# Altium PCB final.PcbDoc
Units mm, origin at the board's own origin, x right, y up, seen from the top; angles counter-clockwise.
Board outline 152.4 x 101.6 mm, 2 copper layers (Top Layer, Bottom Layer); 5 components, 12 nets, 30 pads, 2 vias.
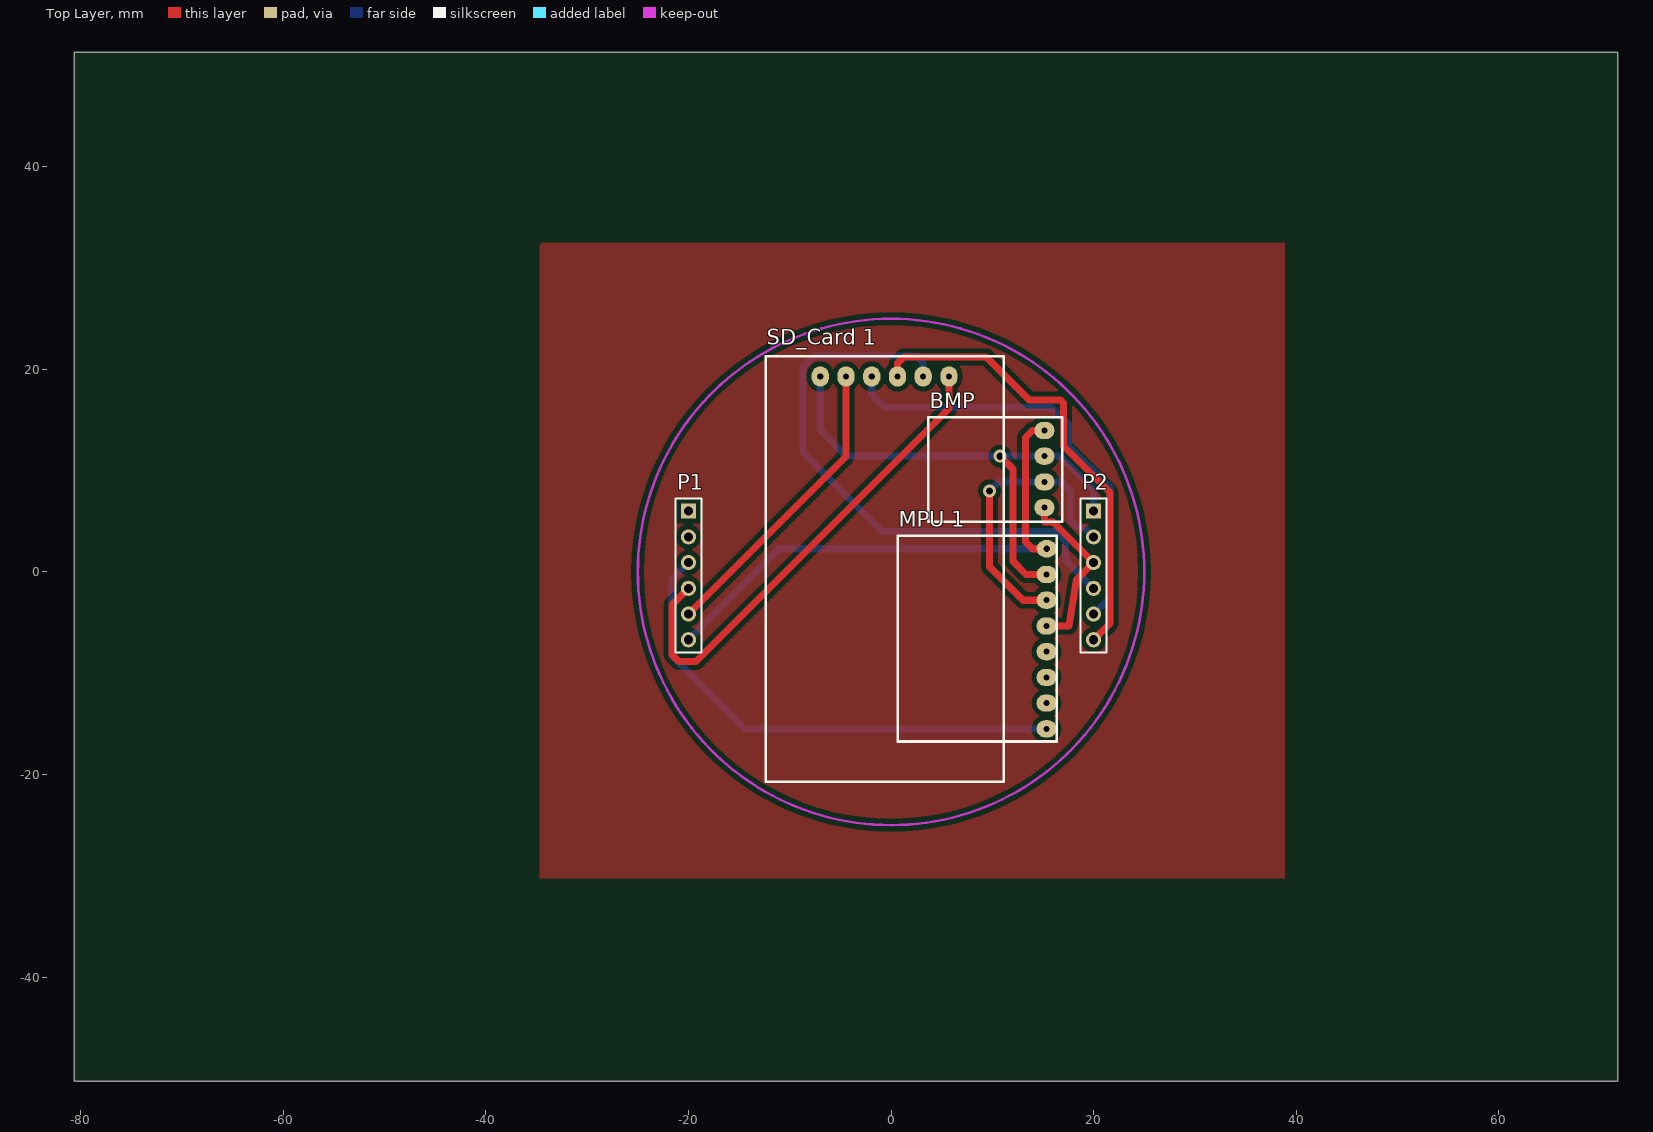
[diagram p0: Top Layer view]
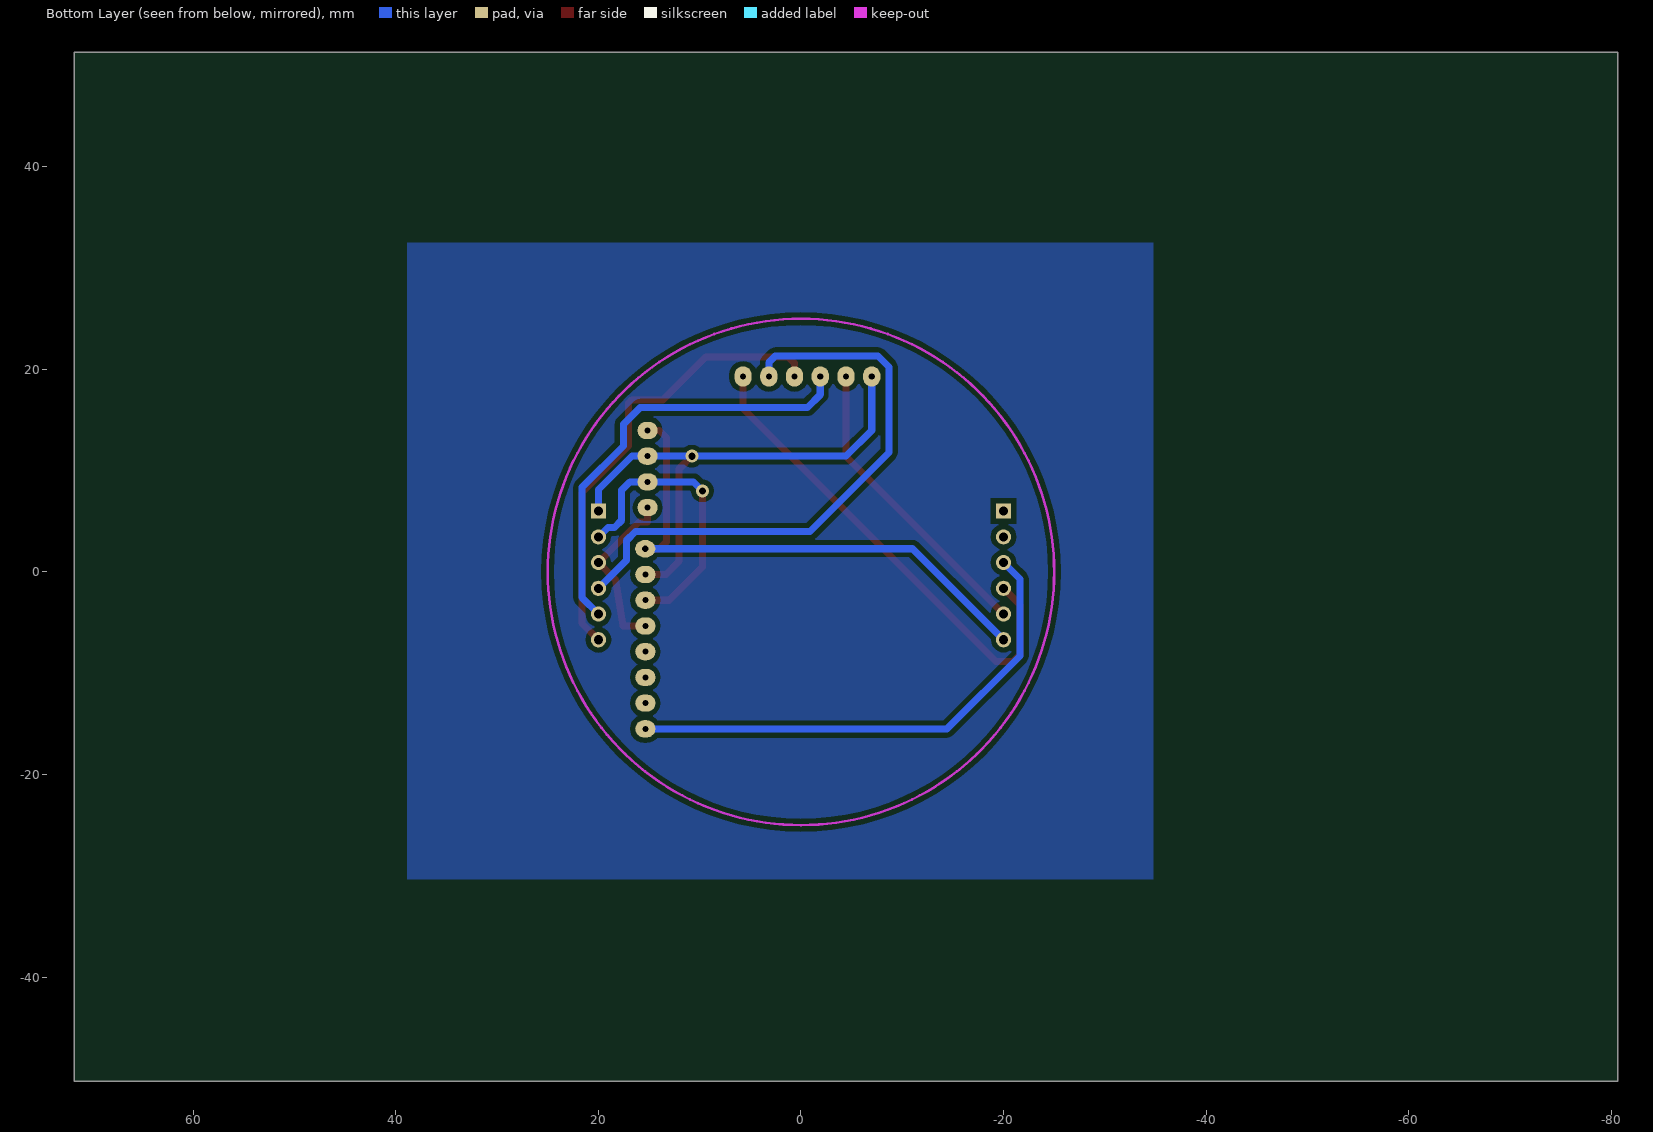
[diagram p1: Bottom Layer view, seen from below]

## Layer stack, top to bottom
Top Solder: solder mask 0.0102, Solder Resist, Dk 3.5
Top Layer: signal copper 0.0356
Dielectric 1: dielectric 0.32, FR-4, Dk 4.8
Bottom Layer: signal copper 0.0356
Bottom Solder: solder mask 0.0102, Solder Resist, Dk 3.5

## Board outline
-80.645,-50.292 71.755,-50.292 71.755,51.308 -80.645,51.308

## Design rules (kind name [scope] priority, off if disabled: settings)
Clearance [All] p1: gap=0.5 ignorepadtopadclearanceinfootprint=FALSE
PolygonConnect [All] p1: connectstyle=Relief reliefconductorwidth=0.254 reliefentries=4 polygonreliefangle="90 Angle" airgapwidth=0.254
RoutingVias [All] p1: holewidth=0.711 width=1.27 viastyle="Through Hole" minholewidth=0.711 minwidth=1.27 maxholewidth=0.711 maxwidth=1.27
SolderMaskExpansion [All] p1: expansion=0.102
Width [All] p1: maxlimit=1 minlimit=0.5 preferedwidth=0.7
30 further rules are at their usual default settings.

## Components (designator, comment, footprint, x,y, rotation, side; value= is the part's Value field where it differs from the comment)
BMP "BMP" BMP 10.287,10.16 r90 top
"MPU 1" "MPU" MPU 0.667,3.556 r90 top
P1 "Header 6" HDR1X6 -20,6 r270 top
P2 "Header 6" HDR1X6 20,6 r270 top
"SD_Card 1" "SD_Card" SD_Card -0.635,21.304 r180 top

## Footprints (in the part's own frame and the unit in brackets; to place one, negate y for a bottom-side part, rotate by r counter-clockwise, add the part's x,y. Pads: shape width x height; smd on the part's side, far side on the other; paste and mask are expansions set on the pad)
BMP [mm]
  oval 1.7x2 hole 0.6: 28(-3.81,-4.858) 29(-1.27,-4.858) 30(1.27,-4.858) 31(3.81,-4.858)
  silkscreen extent -5.21,-6.6 5.09,6.6
HDR1X6 [mm] "Connector; Header; 6 Position"
  rect 1.5x1.5 hole 0.9: 1(0,0)
  round 1.5 hole 0.9: 2(2.54,0) 3(5.08,0) 4(7.62,0) 5(10.16,0) 6(12.7,0)
  silkscreen extent -1.27,-1.27 13.97,1.27
MPU [mm]
  oval 1.7x2 hole 0.6: 1(-19.05,-14.7) 2(-16.51,-14.7) 3(-13.97,-14.7) 4(-11.43,-14.7) 5(-8.89,-14.7) 6(-6.35,-14.7) 7(-3.81,-14.7) 8(-1.27,-14.71)
  silkscreen extent -20.3,-15.7 0,0
SD_Card [mm]
  oval 1.7x2 hole 0.6: 37(6.35,2) 38(3.81,2) 39(1.27,2) 40(-1.27,2) 41(-3.81,2) 42(-6.35,2)
  silkscreen extent -11.75,0 11.75,42.04

## Part data
P1 P2: "Header, 6-Pin", LatestRevisionDate=17-Jul-2002, LatestRevisionNote="Re-released for DXP Platform.", Publisher="Altium Limited"

## Via types
v1: diameter 1.27, hole 0.711, Top Layer to Bottom Layer, 2 vias

## Nets (pads, with @x,y where several pads share a name; then routed paths per layer and width w, separated by ;. In a path a pad name is that pad's centre, name@x,y a point inside that pad or via, vN(x,y) a via of type N, cw(c..) or ccw(c..) an arc to the next point about the centre after c; other vN are vias at no path point)
"3.3 volt": "MPU 1.8" BMP.31 P1.6 | length 53.9
  Top Layer w0.7: BMP.31 13.97,13.97 13.284,13.284 13.284,2.972 13.97,2.286 15.377,2.286
  Bottom Layer w0.7: P1.6 -11.014,2.286 15.377,2.286
"5 volt": "SD_Card 1.38" P1.5 | length 29.9
  Top Layer w0.7: P1.5 -4.445,11.395 -4.445,19.304
CS: "SD_Card 1.42" P1.4 | length 48.3
  Top Layer w0.7: P1.4 -21.615,-3.235 -21.615,-8.179 -20.955,-8.839 -19.253,-8.839 5.715,16.129 5.715,19.304
GND: "MPU 1.7" "SD_Card 1.37" BMP.30 P2.1 | length 51.6
  Top Layer w0.7: v1(10.77,11.43) 12.065,10.135 12.065,1.016 13.335,-0.254 15.367,-0.254
  Bottom Layer w0.7: -6.985,19.304 -6.985,13.97 -4.445,11.43 v1(10.77,11.43) BMP.30 16.698,11.43 20,8.128 P2.1
INT: "MPU 1.1" P1.3 | length 49.9
  Bottom Layer w0.7: P1.3 -21.615,-0.695 -21.615,-8.306 -14.427,-15.494 15.367,-15.494
MISO: "SD_Card 1.39" P2.5 | length 43.5
  Bottom Layer w0.7: -1.905,19.304 -1.905,17.501 -0.635,16.231 15.875,16.231 17.526,14.58 17.526,12.446 21.615,8.357 21.615,-2.545 P2.5
MOSI: "SD_Card 1.40" P2.6 | length 45.8
  Top Layer w0.7: 0.635,19.304 0.635,20.599 1.27,21.234 9.398,21.234 13.64,16.993 16.713,16.993 17.018,16.688 17.018,12.446 21.615,7.849 21.615,-5.085 P2.6
RX: P1.1
SCK: "SD_Card 1.41" P2.4 | length 57.8
  Bottom Layer w0.7: 3.175,19.304 3.175,20.676 2.54,21.311 -7.62,21.311 -8.687,20.244 -8.687,11.786 -0.889,3.988 16.332,3.988 17.247,3.073 17.247,1.133 P2.4
SCL: "MPU 1.6" BMP.29 P2.2 | length 29.1
  Top Layer w0.7: v1(9.728,8.001) 9.728,0.508 13.03,-2.794 15.367,-2.794
  Bottom Layer w0.7: v1(9.728,8.001) 10.617,8.89 BMP.29 16.903,8.89 17.704,8.089 17.704,5.105 18.415,4.394 19.066,4.394 P2.2
SDA: "MPU 1.5" BMP.28 P2.3 | length 17.2
  Top Layer w0.7: BMP.28 15.145,4.928 15.992,4.928 P2.3 18.339,-0.741 17.577,-5.334 15.367,-5.334
TX: P1.2
pads on no net: "MPU 1.2" "MPU 1.3" "MPU 1.4"

## Polygon pours and split planes (outlines as drawn)
no net on Top Layer (solid, pour order 36): 38.862,32.512 -34.417,32.512 -34.671,32.258 -34.671,-30.226 38.862,-30.226
no net on Top Layer "Top Layer-No Net 1" (solid, pour order 32): 37.846,-36.83
no net on Top Layer "Top Layer-No Net" (solid, pour order 14): 11.176,-82.677
no net on Bottom Layer (solid, pour order 38): 38.862,32.512 -34.798,32.512 -34.798,-30.353 38.862,-30.353

## Keep-outs
Keep-Out Layer:
  circle w0.254: c0,0 r25